# Altium PCB PCB1.PcbDoc
Units mil, origin at the board's own origin, x right, y up, seen from the top; angles counter-clockwise.
Board outline 6000 x 4000 mil, 2 copper layers (Top Layer, Bottom Layer); 37 components, 28 nets, 157 pads, 57 vias.
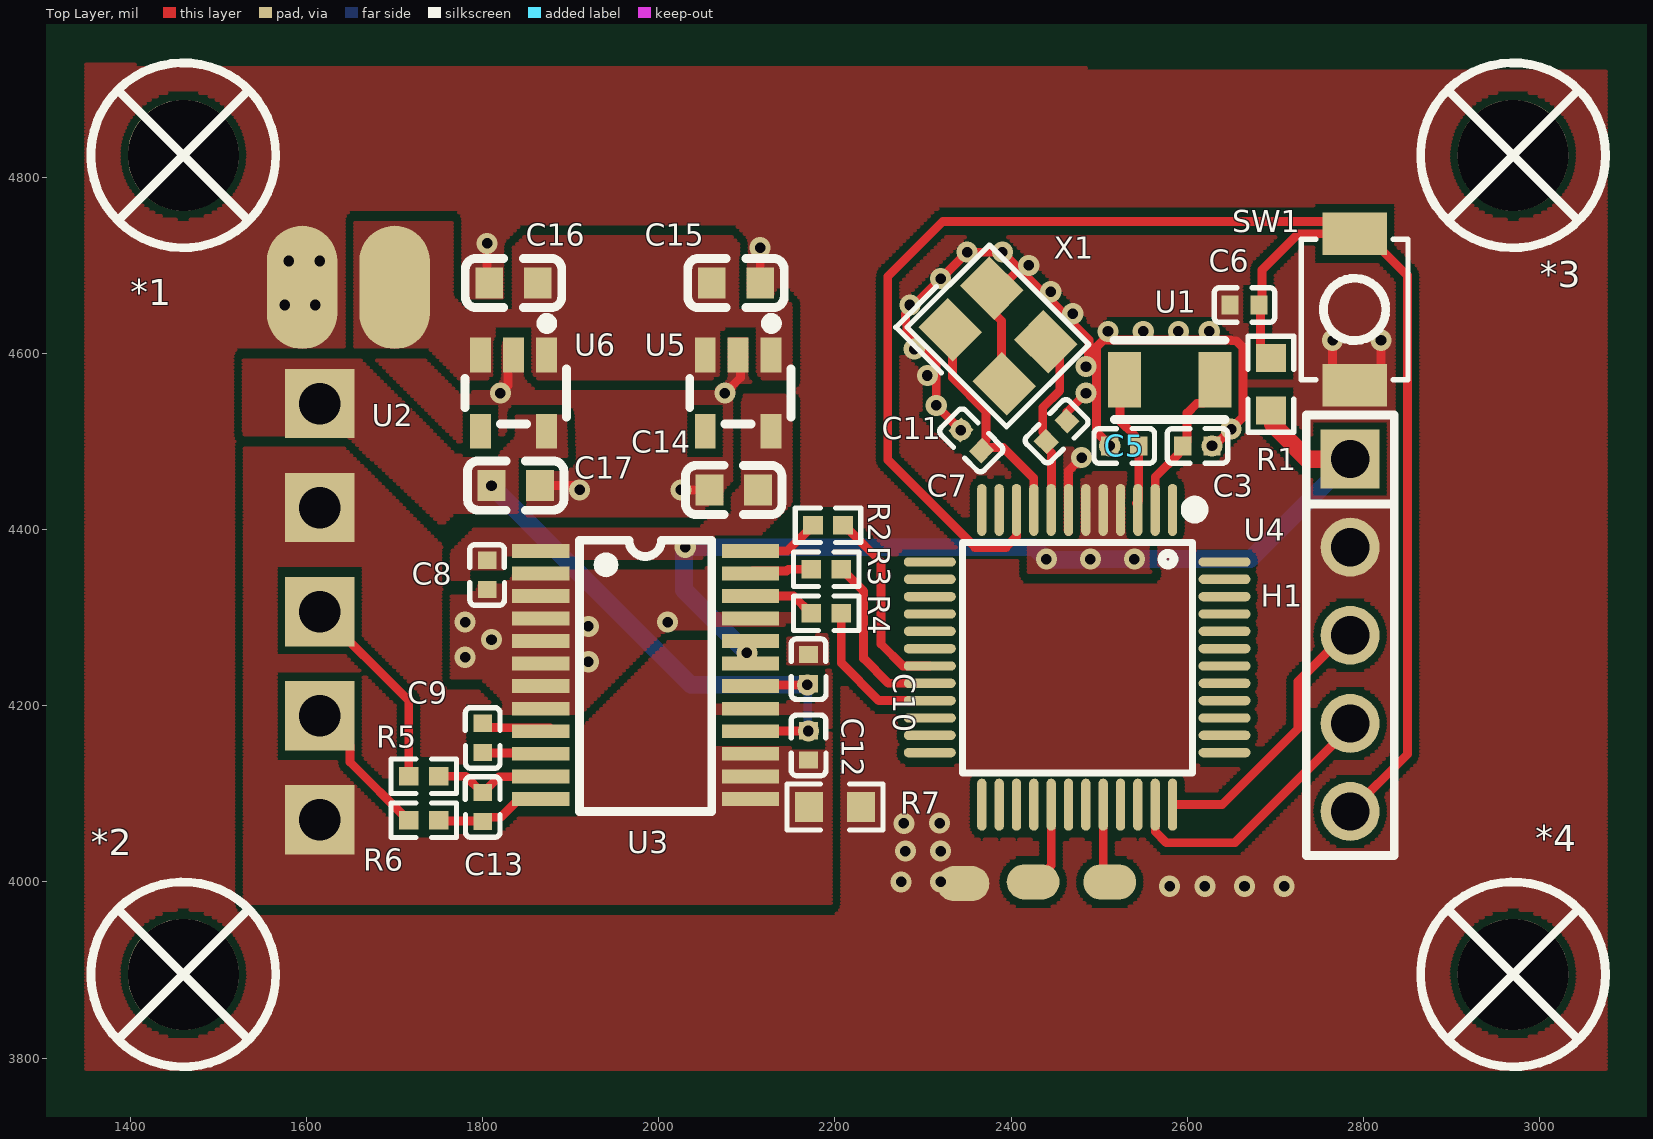
[diagram p0: Top Layer view]
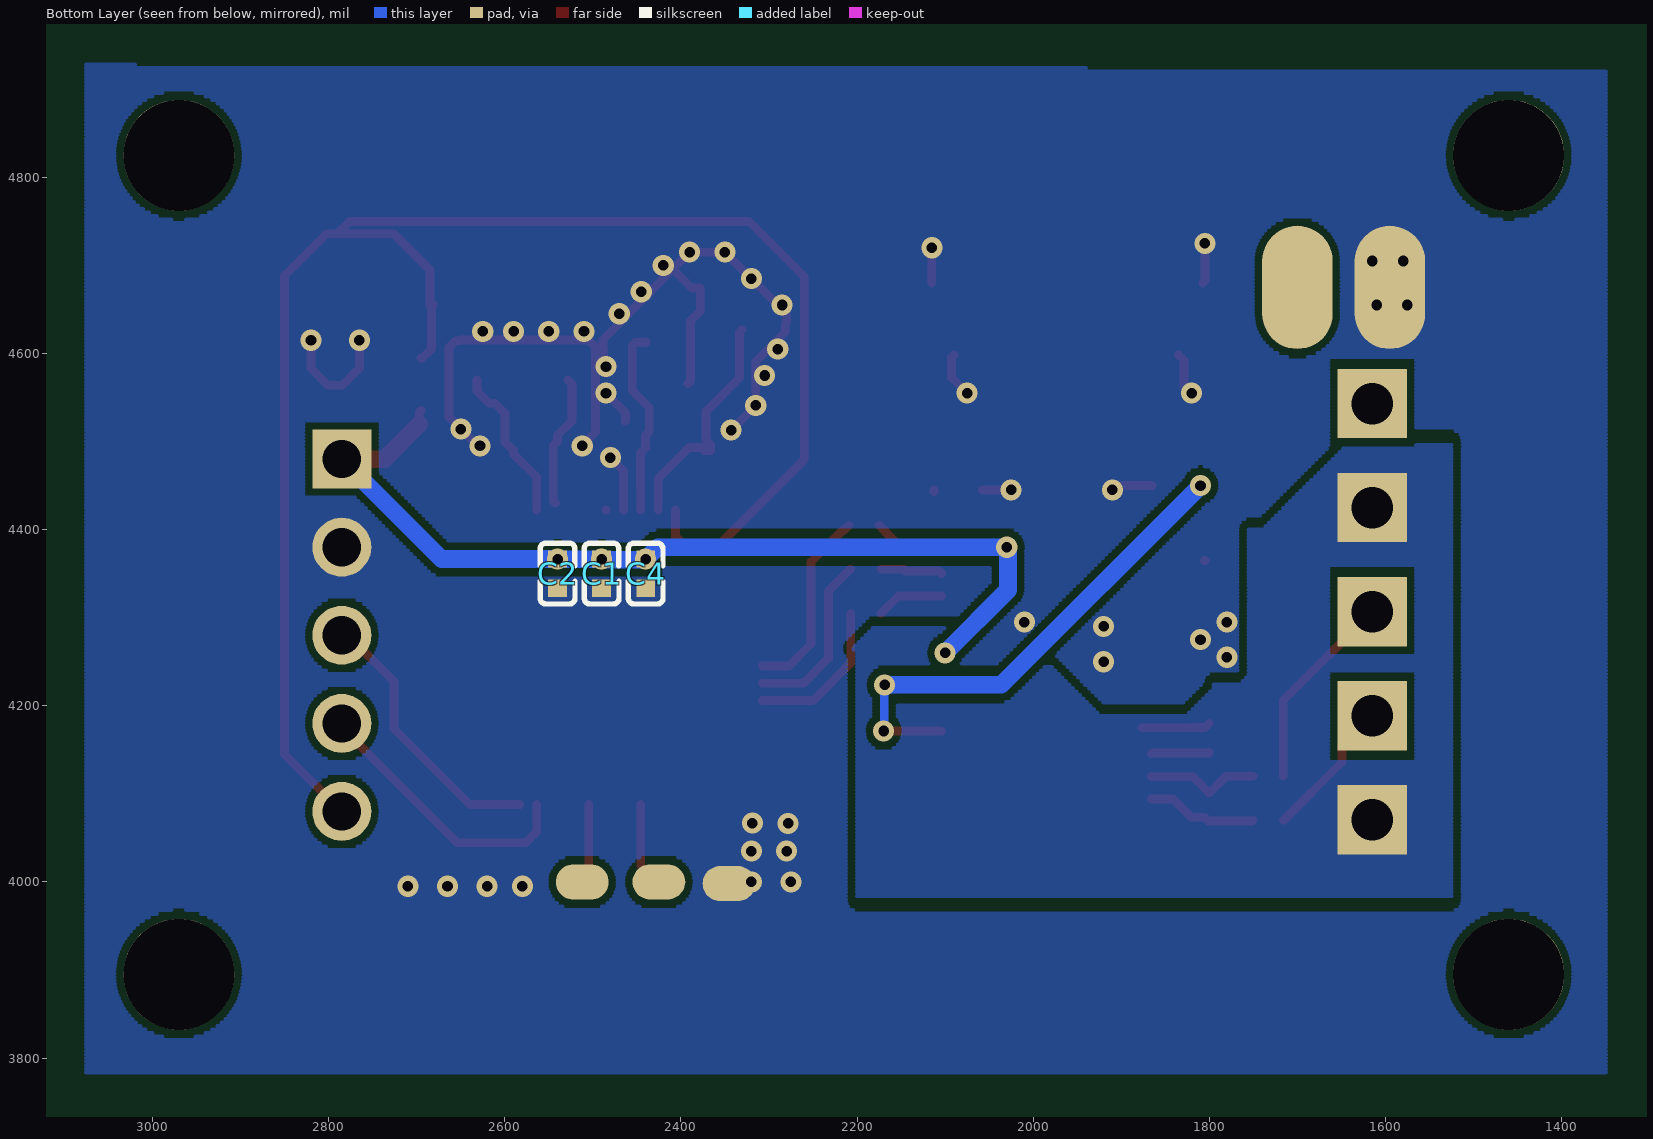
[diagram p1: Bottom Layer view, seen from below]

## Layer stack, top to bottom
Top Solder: solder mask 0.4, Solder Resist, Dk 3.5
Top Layer: signal copper 1.4
Dielectric 1: dielectric 12.6, FR-4, Dk 4.8
Bottom Layer: signal copper 1.4
Bottom Solder: solder mask 0.4, Solder Resist, Dk 3.5

## Board outline
1000,1000 7000,1000 7000,5000 1000,5000

## Design rules (kind name [scope] priority, off if disabled: settings)
Clearance [All] p1: gap=8 ignorepadtopadclearanceinfootprint=FALSE
ComponentClearance [All] p1: gap=0 collisioncheckmode=3 verticalgap=0 showdistances=FALSE
HoleSize [All] p1: absolutevalues=TRUE maxlimit=130 minlimit=1 maxpercent=80.000 minpercent=20.000
MinimumSolderMaskSliver [All] p1: minsoldermaskwidth=4
PlaneConnect [All] p1: planeconnectstyle=Direct reliefexpansion=20 reliefentries=4 reliefconductorwidth=10 reliefairgap=10
PolygonConnect [All] p1: connectstyle=Direct reliefconductorwidth=10 reliefentries=4 polygonreliefangle="90 Angle" airgapwidth=10
RoutingVias [All] p1: holewidth=28 width=50 viastyle="Through Hole" minholewidth=28 minwidth=50 maxholewidth=28 maxwidth=50
SilkToSilkClearance [All] p1: silktosilkclearance=2
SilkToSolderMaskClearance [IsPad] p1: minsilkscreentomaskgap=2 clearancetoexposedcopper=TRUE
SolderMaskExpansion [All] p1: expansion=0 istentingtop=FALSE
SupplyNets "Schematic Supply Nets_2" [InNet('6V')] p1: voltage=0.000
SupplyNets "Schematic Supply Nets" [InNet('3V3')] p2: voltage=0.000
SupplyNets "Schematic Supply Nets_4" [InNet('5V')] p3: voltage=0.000
SupplyNets "Schematic Supply Nets_3" [InNet('DGND')] p4: voltage=0.000
SupplyNets "Schematic Supply Nets_1" [InNet('AGND')] p5: voltage=0.000
Width [All] p1: maxlimit=50 minlimit=10 preferedwidth=10
24 further rules are at their usual default settings.

## Components (designator, comment, footprint, x,y, rotation, side; value= is the part's Value field where it differs from the comment)
*1 "螺丝孔_1" M3螺丝 1460,4825 r0 top
*2 "螺丝孔_1" M3螺丝 1460,3895 r0 top
*3 "螺丝孔_1" M3螺丝 2970,4825 r0 top
*4 "螺丝孔_1" M3螺丝 2970,3895 r0 top
C1 "cc0402krx7r7bb104" C0402 2490,4350 r90 bottom value=100nF
C2 "cc0402krx7r7bb104" C0402 2540,4350 r270 bottom value=100nF
C3 "cc0402jrnpo9bn220" C0402 2611.54,4495 r180 top value=22pF
C4 "cc0402krx7r7bb104" C0402 2440,4350 r270 bottom value=100nF
C5 "cc0402jrnpo9bn220" C0402 2528.46,4495 r0 top value=22pF
C6 "cc0402krx7r7bb104" C0402 2665,4655 r0 top value=100nF
C7 "cc0402jrnpo9bn180" C0402 2451.7,4511.7 r45 top value=18pF
C8 "cc0402krx7r7bb104" C0402 1805,4348.46 r270 top value=100nF
C9 "cc0402krx7r7bb104" C0402 1800,4163.46 r90 top value=100nF
C10 "cc0402krx7r7bb104" C0402 2170,4241.54 r90 top value=100nF
C11 "cc0402jrnpo9bn180" C0402 2354.68,4501.29 r315 top value=18pF
C12 "gcm155r71h103ka55d" C0402 2170,4155 r270 top value=10nF
C13 "gcm155r71h103ka55d" C0402 1800,4085 r270 top value=10nF
C14 "cga0603x5r105k500jt" C0603 2085,4445 r180 top value=1uF
C15 "cga0603x5r105k500jt" C0603 2087.56,4680 r0 top value=1uF
C16 "cga0603x5r105k500jt" C0603 1835,4680 r180 top value=1uF
C17 "cga0603x5r105k500jt" C0603 1837.44,4450 r0 top value=1uF
H1 "pz254v-11-05p" HDR-TH_5P-P2.54-V-M 2785,4280 r270 top
R1 "frc0603f1002ts" R0603 2695,4565 r270 top value=10kΩ
R2 "frc0402f47r0ts" R0402 2192.04,4405 r0 top value=47Ω
R3 "frc0402f47r0ts" R0402 2190,4355 r0 top value=47Ω
R4 "frc0402f47r0ts" R0402 2190,4305 r0 top value=47Ω
R5 "frc0402f1000ts" R0402 1732.96,4120 r0 top value=100Ω
R6 "frc0402f1000ts" R0402 1732.96,4070 r0 top value=100Ω
R7 "0603waf0000t5e" R0603 2200,4085 r0 top value=0Ω
SW1 "ts-1088-ar02016" SW-SMD_L3.9-W3.0-P4.45 2790,4650 r90 top
U1 "fc31m2-32.768-ntlnndtl" CRYSTAL-SMD_L3.2-W1.5 2580,4570 r0 top value=32.768kHz
U2 "5个焊盘" 5个焊盘 1615,4543.1 r270 top
U3 "ads1232ipwr" TSSOP-24_L7.8-W4.4-P0.65-LS6.4-BL 1985,4235 r270 top
U4 "stm32g031c8t6" LQFP-48_L7.0-W7.0-P0.50-LS9.0-BL 2475,4255 r180 top
U5 "tps7a2033pdbvr" SOT-23-5_L2.9-W1.6-P0.95-LS2.8-BR 2090,4555 r90 top
U6 "tps7a2050pdbvr" SOT-23-5_L2.9-W1.6-P0.95-LS2.8-BR 1835,4555 r90 top
X1 "x32258mob4si" CRYSTAL-SMD_4P-L3.2-W2.5-BL 2385,4620 r315 top value=8MHz

## Footprints (in the part's own frame and the unit in brackets; to place one, negate y for a bottom-side part, rotate by r counter-clockwise, add the part's x,y. Pads: shape width x height; smd on the part's side, far side on the other; paste and mask are expansions set on the pad)
5个焊盘 [mm]
  rect 2x2 hole 1.2: 1(0,0) 2(3,0) 3(6.001,0) 4(9,0) 5(12,0)
C0402 [mm]
  rect 0.5x0.54 smd: 1(-0.42,0) 2(0.42,0)
  silkscreen extent -0.87,-0.5 0.87,0.5
C0603 [mm]
  rect 0.8x0.9 smd: 1(-0.7,0) 2(0.7,0)
  silkscreen extent -1.39,-0.71 1.39,0.71
CRYSTAL-SMD_4P-L3.2-W2.5-BL [mm]
  rect 1.4x1.2 smd: 1(-1.1,-0.85) 2(1.1,-0.85) 3(1.1,0.85) 4(-1.1,0.85)
  silkscreen extent -2.26,-1.91 2.03,1.68
CRYSTAL-SMD_L3.2-W1.5 [mm]
  rect 0.95x1.6 smd: 1(-1.308,0) 2(1.308,0)
  silkscreen extent -1.6,-1.14 1.6,1.14
HDR-TH_5P-P2.54-V-M [mm]
  rect 1.7x1.7 hole 1.1: 1(-5.08,0)
  round 1.7 hole 1.1: 2(-2.54,0) 3(0,0) 4(2.54,0) 5(5.08,0)
  silkscreen extent -6.35,-1.27 6.35,1.27
LQFP-48_L7.0-W7.0-P0.50-LS9.0-BL [mm]
  oval 0.27x1.5 smd paste+0 mask+0.05: 1(-2.75,-4.25) 2(-2.25,-4.25) 3(-1.75,-4.25) 4(-1.25,-4.25) 5(-0.75,-4.25) 6(-0.25,-4.25) 7(0.25,-4.25) 8(0.75,-4.25) 9(1.25,-4.25) 10(1.75,-4.25) 11(2.25,-4.25) 12(2.75,-4.25) 25(2.75,4.25) 26(2.25,4.25) 27(1.75,4.25) 28(1.25,4.25) 29(0.75,4.25) 30(0.25,4.25) 31(-0.25,4.25) 32(-0.75,4.25) 33(-1.25,4.25) 34(-1.75,4.25) 35(-2.25,4.25) 36(-2.75,4.25)
  oval 1.5x0.27 smd paste+0 mask+0.05: 13(4.25,-2.75) 14(4.25,-2.25) 15(4.25,-1.75) 16(4.25,-1.25) 17(4.25,-0.75) 18(4.25,-0.25) 19(4.25,0.25) 20(4.25,0.75) 21(4.25,1.25) 22(4.25,1.75) 23(4.25,2.25) 24(4.25,2.75) 37(-4.25,2.75) 38(-4.25,2.25) 39(-4.25,1.75) 40(-4.25,1.25) 41(-4.25,0.75) 42(-4.25,0.25) 43(-4.25,-0.25) 44(-4.25,-0.75) 45(-4.25,-1.25) 46(-4.25,-1.75) 47(-4.25,-2.25) 48(-4.25,-2.75)
  silkscreen extent -3.59,-4.46 3.3,3.34
M3螺丝 [mil]
  round 126 hole 126 paste-99999 mask+4: 1(0,0)
  silkscreen extent -105,-105 105,105
R0402 [mm]
  rect 0.566x0.54 smd paste-100 mask+0.051: 1(-0.433,0) 2(0.433,0)
  silkscreen extent -0.94,-0.5 0.94,0.5
R0603 [mil]
  rect 31.75x34.02 smd paste-3937.01 mask+2: 1(-29.66,0) 2(29.66,0)
  silkscreen extent -55,-26 55,26
SOT-23-5_L2.9-W1.6-P0.95-LS2.8-BR [mm]
  rect 1x0.6 smd paste+0 mask+0.05: 1(1.1,-0.95) 2(1.1,0) 3(1.1,0.95) 4(-1.1,0.95) 5(-1.1,-0.95)
  silkscreen extent -0.89,-1.52 2.16,1.4
SW-SMD_L3.9-W3.0-P4.45 [mm]
  rect 1.23x1.86 smd: 1(-2.185,0) 2(2.185,0)
  silkscreen extent -2.03,-1.54 2.03,1.54
TSSOP-24_L7.8-W4.4-P0.65-LS6.4-BL [mm]
  rect 0.4x1.65 smd: 1(-3.575,-3.023) 2(-2.925,-3.023) 3(-2.275,-3.023) 4(-1.625,-3.023) 5(-0.975,-3.023) 6(-0.325,-3.023) 7(0.325,-3.023) 8(0.975,-3.023) 9(1.625,-3.023) 10(2.275,-3.023) 11(2.925,-3.023) 12(3.575,-3.023) 13(3.575,3.023) 14(2.925,3.023) 15(2.275,3.023) 16(1.625,3.023) 17(0.975,3.023) 18(0.325,3.023) 19(-0.325,3.023) 20(-0.975,3.023) 21(-1.625,3.023) 22(-2.275,3.023) 23(-2.925,3.023) 24(-3.575,3.023)
  silkscreen extent -3.89,-1.91 3.94,1.91

## Part data
C1 C2 C4 C6 C8 C9 C10: "容值:100nF;精度:±10%;额定电压:16V;温度系数:X7R;", JLCPCB Part Class="Extended Part", LCSC Part Name="100nF ±10% 16V", Manufacturer=YAGEO(国巨), ManufacturerPart=CC0402KRX7R7BB104, Temperature Coefficient=X7R, Tolerance=±10%, Voltage Rating=16V, AddInBom=yes, ConvertToPcb=yes, Datasheet=https://item.szlcsc.com/datasheet/CC0402KRX7R7BB104/61526.html, FootprintName=C0402, ModelId=36a51122f27c49738f86b3bfa98863e0, ModelName=C0402_L1.0-W0.5-H0.5, ModelTransform=39.37,19.685,0,0,0,0,0,0,0, Supplier=LCSC, Supplier Footprint=0402, SupplierPart=C60474, Symbol=CC0402KRX7R7BB104
C3 C5: "容值:22pF;精度:±5%;额定电压:50V;温度系数:NP0;", JLCPCB Part Class="Extended Part", LCSC Part Name="22pF ±5% 50V", Manufacturer=YAGEO(国巨), ManufacturerPart=CC0402JRNPO9BN220, Temperature Coefficient=NP0, Tolerance=±5%, Voltage Rating=50V, AddInBom=yes, ConvertToPcb=yes, Datasheet=https://item.szlcsc.com/datasheet/CC0402JRNPO9BN220/107418.html, FootprintName=C0402, ModelId=36a51122f27c49738f86b3bfa98863e0, ModelName=C0402_L1.0-W0.5-H0.5, ModelTransform=39.37,19.685,0,0,0,0,0,0,0, Supplier=LCSC, Supplier Footprint=0402, SupplierPart=C106203, Symbol=CC0402JRNPO9BN220
C7 C11: "容值:18pF;精度:±5%;额定电压:50V;温度系数:NP0;", JLCPCB Part Class="Extended Part", LCSC Part Name="18pF ±5% 50V", Manufacturer=YAGEO(国巨), ManufacturerPart=CC0402JRNPO9BN180, Temperature Coefficient=NP0, Tolerance=±5%, Voltage Rating=50V, AddInBom=yes, ConvertToPcb=yes, Datasheet=https://item.szlcsc.com/datasheet/CC0402JRNPO9BN180/107417.html, FootprintName=C0402, ModelId=36a51122f27c49738f86b3bfa98863e0, ModelName=C0402_L1.0-W0.5-H0.5, ModelTransform=39.37,19.685,0,0,0,0,0,0,0, Supplier=LCSC, Supplier Footprint=0402, SupplierPart=C106202, Symbol=CC0402JRNPO9BN180
C12 C13: "容值:10nF;精度:±10%;额定电压:50V;温度系数:X7R;", JLCPCB Part Class="Extended Part", LCSC Part Name="10nF ±10% 50V", Manufacturer=muRata(村田), ManufacturerPart=GCM155R71H103KA55D, Temperature Coefficient=X7R, Tolerance=±10%, Voltage Rating=50V, AddInBom=yes, ConvertToPcb=yes, Datasheet=https://item.szlcsc.com/datasheet/GCM155R71H103KA55D/92790.html, FootprintName=C0402, ModelId=36a51122f27c49738f86b3bfa98863e0, ModelName=C0402_L1.0-W0.5-H0.5, ModelTransform=39.37,19.685,0,0,0,0,0,0,0, Supplier=LCSC, Supplier Footprint=0402, SupplierPart=C91601, Symbol=GCM155R71H103KA55D
C14 C15 C16 C17: "容值:1uF;精度:±10%;额定电压:50V;温度系数:X5R;", JLCPCB Part Class="Extended Part", LCSC Part Name="1uF ±10% 50V 停产", Manufacturer=HRE(芯声), ManufacturerPart=CGA0603X5R105K500JT, Temperature Coefficient=X5R, Tolerance=±10%, Voltage Rating=50V, AddInBom=yes, ConvertToPcb=yes, Datasheet=https://item.szlcsc.com/datasheet/CGA0603X5R105K500JT/7062558.html, FootprintName=C0603, ModelId=ac125912035d415993ca9572d50418b1, ModelName=C0603_L1.6-W0.8-H0.8, ModelTransform=62.992,31.496,0,0,0,0,0,0,0, Supplier=LCSC, Supplier Footprint=0603, SupplierPart=C6119852, Symbol=CGA0603X5R105K500JT
H1: "插针结构:1x5P;间距:2.54mm;行距:-;圆针/方针:方针;安装方式:直插;排数:单排;总PIN位数:5P;额定电流:3A;额定电压:250V;配合针长度:6mm;塑高:2.5mm;端接针长度:3mm;触头材质:黄铜;触头镀层:-;工作温度:-40℃~+105℃;颜色:黑色;", Color=黑色, Current Rating=3A, JLCPCB Part Class="Extended Part", LCSC Part Name="1x5P 间距:2.54mm 方针 直插", Manufacturer=XFCN(兴飞), ManufacturerPart=PZ254V-11-05P, Operating Temperature=-40℃~+105℃, Voltage Rating (Max)=250V, AddInBom=yes, Circluar Pins/Square Pins=方针, Contact Material=黄铜, Contact Plating=-, ConvertToPcb=yes, Datasheet=https://item.szlcsc.com/datasheet/PZ254V-11-05P/502960.html, FootprintName=HDR-TH_5P-P2.54-V-M, Insulation Height=2.5mm, Length of End Connection Pin=3mm, Length of Mating Pin=6mm, ModelId=47d466e4a34f4fc5bc626cf773a24dd5, ModelName=HDR-TH_5P-P2.54-M-LI-1X5P, ModelTransform=499.999,100,0,0,0,0,0,0,-118.11, Mounting Type=直插, Number of Pins=5P, Number of Rows=单排, Pin Structure=1x5P, Pitch=2.54mm, Row Spacing=-, Supplier=LCSC, Supplier Footprint=插件,P=2.54mm, SupplierPart=C492404, Symbol=PZ254V-11-05P
R1: "电阻类型:厚膜电阻;阻值:10kΩ;精度:±1%;功率:100mW;工作电压:75V;温度系数:±100ppm/℃;", JLCPCB Part Class="Extended Part", LCSC Part Name="10kΩ ±1% 100mW 厚膜电阻", Manufacturer=FOJAN(富捷), ManufacturerPart=FRC0603F1002TS, Operating Temperature=-55℃~+155℃, Power(Watts)=100mW, Temperature Coefficient=±100ppm/℃, Tolerance=±1%, Voltage-Supply(Max)=75V, AddInBom=yes, ConvertToPcb=yes, Datasheet=https://item.szlcsc.com/datasheet/FRC0603F1002TS/3180495.html, FootprintName=R0603, ModelId=fc143cca1e79419f9cd78b61e9279f08, ModelName=R0603, ModelTransform=31.8897,63.7794,0,90,0,0,0,0,0, Supplier=LCSC, Supplier Footprint=0603, SupplierPart=C2906982, Symbol=FRC0603F1002TS, Type=厚膜电阻
R2 R3 R4: "电阻类型:厚膜电阻;阻值:47Ω;精度:±1%;功率:62.5mW;工作电压:50V;温度系数:±100ppm/℃;", JLCPCB Part Class="Extended Part", LCSC Part Name="47Ω ±1% 62.5mW 厚膜电阻", Manufacturer=FOJAN(富捷), ManufacturerPart=FRC0402F47R0TS, Operating Temperature=-55℃~+155℃, Power(Watts)=62.5mW, Temperature Coefficient=±100ppm/℃, Tolerance=±1%, Voltage-Supply(Max)=50V, AddInBom=yes, ConvertToPcb=yes, Datasheet=https://item.szlcsc.com/datasheet/FRC0402F47R0TS/3186297.html, FootprintName=R0402, ModelId=98c88bc2b9094f218f3a3e30a7012738, ModelName=R0402_L1.0-W0.5-H0.4, ModelTransform=39.37,19.685,0,0,0,0,0,0,0, Supplier=LCSC, Supplier Footprint=0402, SupplierPart=C2909362, Symbol=FRC0402F47R0TS, Type=厚膜电阻
R5 R6: "电阻类型:厚膜电阻;阻值:100Ω;精度:±1%;功率:62.5mW;工作电压:50V;温度系数:±100ppm/℃;", JLCPCB Part Class="Extended Part", LCSC Part Name="100Ω ±1% 62.5mW 厚膜电阻", Manufacturer=FOJAN(富捷), ManufacturerPart=FRC0402F1000TS, Operating Temperature=-55℃~+155℃, Power(Watts)=62.5mW, Temperature Coefficient=±100ppm/℃, Tolerance=±1%, Voltage-Supply(Max)=50V, AddInBom=yes, ConvertToPcb=yes, Datasheet=https://item.szlcsc.com/datasheet/FRC0402F1000TS/3180373.html, FootprintName=R0402, ModelId=98c88bc2b9094f218f3a3e30a7012738, ModelName=R0402_L1.0-W0.5-H0.4, ModelTransform=39.37,19.685,0,0,0,0,0,0,0, Supplier=LCSC, Supplier Footprint=0402, SupplierPart=C2906860, Symbol=FRC0402F1000TS, Type=厚膜电阻
R7: "电阻类型:厚膜电阻;阻值:0Ω;精度:±1%;功率:100mW;工作电压:75V;温度系数:-;", JLCPCB Part Class="Basic Part", LCSC Part Name="0Ω ±1% 100mW 厚膜电阻", Manufacturer=UNI-ROYAL(厚声), ManufacturerPart=0603WAF0000T5E, Operating Temperature=-55℃~+155℃, Power(Watts)=100mW, Temperature Coefficient=-, Tolerance=±1%, Voltage-Supply(Max)=75V, AddInBom=yes, ConvertToPcb=yes, Datasheet=https://item.szlcsc.com/datasheet/0603WAF0000T5E/21903.html, FootprintName=R0603, ModelId=fc143cca1e79419f9cd78b61e9279f08, ModelName=R0603, ModelTransform=31.8897,63.7794,0,90,0,0,0,0,0, Supplier=LCSC, Supplier Footprint=0603, SupplierPart=C21189, Symbol=0603WAF0000T5E, Type=厚膜电阻
SW1: "电路结构:单刀单掷;按钮形状:圆形按钮;作用力:1.6N;安装方式:立贴;开关长度:3.9mm;开关宽度:3mm;开关高度:2mm;带支架:不带支架;触点电流:50mA;额定电压:12V;带灯:-;工作寿命:10万次;", Actuator/Cap Color=黑色, Contact Current=50mA, IP Rating=-, JLCPCB Part Class="Basic Part", LCSC Part Name="3.9*3*2mm 立贴 轻触开关", Manufacturer=XUNPU(讯普), ManufacturerPart=TS-1088-AR02016, Operating Force=1.6N, Operating Temperature=-30℃~+80℃, Voltage Rating=12V, Actuator Style=圆形按钮, AddInBom=yes, Circuit=单刀单掷, ConvertToPcb=yes, Datasheet=https://item.szlcsc.com/datasheet/TS-1088-AR02016/763484.html, FootprintName=SW-SMD_L3.9-W3.0-P4.45, Length=3.9mm, Life=10万次, ModelId=b26698b69f274ffabef8a26c7d0e5dd1, ModelName=SW-SMD_L3.9-W2.9-H2.0-LS4.8, ModelTransform=188.976,114.174,0,0,0,0,0,0,0, Mounting Type=立贴, Supplier=LCSC, Supplier Footprint=SMD,4x3mm, SupplierPart=C720477, Switch Height=2mm, Symbol=TS-1088-AR02016, Termination Style=SMD接片, Width=3mm, with Bracket=不带支架, With Lamp=-
U1: "晶振类型:贴片晶振;频率:32.768kHz;常温频差:±10ppm;负载电容:12.5pF;频率稳定度:±10ppm;", Equivalent Series Resistance(ESR)=70kΩ, Frequency Stability=±10ppm, JLCPCB Part Class="Extended Part", LCSC Part Name="3215 2P 32.768kHz 12.5pF ±10ppm -40~+85℃(±10ppm)", Load Capacitance=12.5pF, Manufacturer=HCI(杭晶), ManufacturerPart=FC31M2-32.768-NTLNNDTL, Operating Temperature=-40℃~+85℃, AddInBom=yes, ConvertToPcb=yes, Datasheet=https://item.szlcsc.com/datasheet/FC31M2-32.768-NTLNNDTL/5705379.html, FootprintName=CRYSTAL-SMD_L3.2-W1.5, ModelId=762d7afc596f4558a373612390f4386d, ModelName=CRYSTAL-SMD_L3.2-W1.5-1, ModelTransform=125.984,59.055,0,0,0,0,0,0,0, Normal temperature Frequency Tolerance=±10ppm, Supplier=LCSC, Supplier Footprint=SMD3215-2P, SupplierPart=C5120559, Symbol=FC31M2-32.768-NTLNNDTL, Type=贴片晶振
U3: "分辨率(位):24;采样率:10Hz;工作电压:2.7V~5.3V;接口类型:SPI;", Clock Frequency=4.9152MHz；200kHz~8MHz, JLCPCB Part Class="Extended Part", LCSC Part Name="用于桥式传感器的24bit 模数转换器", Manufacturer=TI(德州仪器), ManufacturerPart=ADS1232IPWR, Operating Temperature=-40℃~+105℃, Quiescent Current (Iq)=1.3uA, Temperature Sensors=内置, Voltage - Supply=2.7V~5.3V, Voltage Reference=外置, Voltage Reference Drift=-, ADC architecture=Sigma-Delta, AddInBom=yes, Clock/Oscillator=内置；外置, ConvertToPcb=yes, Data rate=80Hz；10Hz, Datasheet=https://www.ti.com/cn/lit/gpn/ads1232, differential input=是, FootprintName=TSSOP-24_L7.8-W4.4-P0.65-LS6.4-BL, Full-Scale Range(FSR)=39mV；1.25V；19.5mV；2.5V, Integral non - linearity=-, Interface=SPI, ModelId=57e278220af748a2882c4abba4094eb9, ModelName=TSSOP-24_L7.8-W4.4-H1.0-LS6.4-P0.65, ModelTransform=252.188,307.086,0,90,0,0,0,0,0, number of channels=2, Programmable Gain=支持, Resolution (Bits)=24, Sampling Rate=10Hz, Signal-to-Noise Ratio=-, Supplier=LCSC, Supplier Footprint=TSSOP-24, SupplierPart=C27919, Symbol=ADS1232IPW
U4: "CPU内核:ARM Cortex-M0+;CPU最大主频:64MHz;CPU位数:32 Bit;", JLCPCB Part Class="Extended Part", LCSC Part Name="主流Arm Cortex-M0+ MCU，具有64 KB Flash存储器、8 KB RAM、64 MHz CPU、2x USART、定时器、ADC和通信接口，1.7-3.6V", Manufacturer=ST(意法半导体), ManufacturerPart=STM32G031C8T6, Operating Temperature=-40℃~+85℃, Voltage - Supply=1.7V~3.6V, ADC (Bit)=12bit, AddInBom=yes, ConvertToPcb=yes, Core Size="32 Bit", CPU Core="ARM Cortex-M0+", CPU Maximum Speed=64MHz, Datasheet=https://item.szlcsc.com/datasheet/STM32G031C8T6/428993.html, EEPROM=-, FootprintName=LQFP-48_L7.0-W7.0-P0.50-LS9.0-BL, ModelId=093be70396ff421eb2cdb946d5311efc, ModelName=LQFP-48_L7.0-W7.0-H1.4-LS9.0-P0.50, ModelTransform=354.331,354.331,0,0,0,0,0,0,0, Number of I/O=44, Oscillator Type=内置+外置, Program Memory Type=FLASH, Program Storage Size=64KB, RAM Size=8KB, Supplier=LCSC, Supplier Footprint=LQFP-48(7x7), SupplierPart=C432205, Symbol=STM32G031C8T6
U5: "输出类型:固定;最大输入电压:6V;输出电压:3.3V;输出电流:300mA;输出极性:正极;", Dropout Voltage=140mV@(300mA), JLCPCB Part Class="Extended Part", LCSC Part Name="具有高 PSRR 的 300mA、超低噪声、低 IQ、低压降 (LDO) 线性稳压器", Manufacturer=TI(德州仪器), ManufacturerPart=TPS7A2033PDBVR, Maximum Input Voltage=6V, Operating Temperature=-40℃~+125℃@(Tj), Output Current=300mA, Output Voltage=3.3V, standby current=15uA, AddInBom=yes, ConvertToPcb=yes, Datasheet=https://www.ti.com/cn/lit/gpn/tps7a20, Feature=防静电保护；软启动；浪涌保护；低ESR；热保护(TSD)；欠压闭锁；过流保护(OCP)；带使能；防倒灌, FootprintName=SOT-23-5_L2.9-W1.6-P0.95-LS2.8-BR, ModelId=7ba65df16e7b4570af156e925f9c37fe, ModelName=SOT-23-5_L2.9-W1.6-P0.95-LS2.8-BR, ModelTransform=114.173,114.173,0,90,0,0,0,0,0, Number of Outputs=1, Output Polarity=正极, Output Type=固定, Supplier=LCSC, Supplier Footprint=SOT-23-5, SupplierPart=C2862740, Symbol=TPS7A2033PDBVR
U6: "输出极性:正极;工作电压:6V;输出电压:5V;输出电流:300mA;电源纹波抑制比(PSRR):65dB@(100Hz);输出类型:固定;", JLCPCB Part Class="Extended Part", LCSC Part Name="800mV~5.5V 300mA 6V", Manufacturer=TI(德州仪器), ManufacturerPart=TPS7A2050PDBVR, Operating Temperature=-40℃~+125℃@(Tj), Output Current=300mA, Output Voltage=5V, Power Supply Rejection Ratio (PSRR)=65dB@(100Hz), standby current=6.5uA, Voltage - Supply=6V, Voltage Dropout=140mV@(300mA), AddInBom=yes, ConvertToPcb=yes, Datasheet=https://www.ti.com/cn/lit/ds/symlink/tps7a20.pdf, Features=使能控制；输入欠压保护；内置软启动；短路保护；过流保护；输出放电；热关断, FootprintName=SOT-23-5_L2.9-W1.6-P0.95-LS2.8-BR, ModelId=7ba65df16e7b4570af156e925f9c37fe, ModelName=SOT-23-5_L2.9-W1.6-P0.95-LS2.8-BR, ModelTransform=114.173,114.173,0,90,0,0,0,0,0, Noise=10uVrms, Number of Outputs=1, Output Configuration=正极, Output Type=固定, Supplier=LCSC, Supplier Footprint=SOT-23-5, SupplierPart=C2864504, Symbol=TPS7A2050PDBVR
X1: "晶振类型:贴片晶振;频率:8MHz;常温频差:±10ppm;负载电容:12pF;频率稳定度:±20ppm;", Equivalent Series Resistance(ESR)=180Ω, Frequency Stability=±20ppm, JLCPCB Part Class="Extended Part", LCSC Part Name="YSX321SL 8MHZ 4P 3225 12PF ±10PPM -40~85℃ (±20PPM)", Load Capacitance=12pF, Manufacturer=YXC(扬兴晶振), ManufacturerPart=X32258MOB4SI, Normal temperature Frequency Tolerance=±10ppm, Operating Temperature=-40℃~+85℃, AddInBom=yes, ConvertToPcb=yes, Datasheet=https://item.szlcsc.com/datasheet/X32258MOB4SI/2777872.html, FootprintName=CRYSTAL-SMD_4P-L3.2-W2.5-BL, ModelId=ff2dfd5650294453a14147960efe1838, ModelName=CRYSTAL-SMD_4P-L3.2-W2.5-BL, ModelTransform=125.984,98.425,0,0,0,0,0,0,0, Supplier=LCSC, Supplier Footprint=SMD3225-4P, SupplierPart=C2682775, Symbol=X32258MOB4SI, Type=贴片晶振
U2: Add into BOM=yes, Convert to PCB=yes, Device=5个焊盘, Symbol=5个焊盘

## Free pads (board coordinates)
  oval 80x140 all layers, no hole: 7(1595,4675) 7(1700,4675)
  oval 60x40 all layers, no hole: 7(2345.3,3998) 7(2425,4000) 7(2512,3999.83)

## Via types
v1: diameter 24, hole 12, Top Layer to Bottom Layer, tented both sides, 57 vias

## Nets (pads, with @x,y where several pads share a name; then routed paths per layer and width w, separated by ;. In a path a pad name is that pad's centre, name@x,y a point inside that pad or via, vN(x,y) a via of type N, cw(c..) or ccw(c..) an arc to the next point about the centre after c; other vN are vias at no path point)
3V3: C1.2 C2.1 C4.1 C8.1 C14.1 H1.1 R1.2 U3.1 U3.19 U3.20 U4.4 U4.5 U4.6 U5.5 | length 1084.5
  Top Layer w10: C8.1 C8.1@1805.79,4365 ; C14.1@2112.56,4443.03 C14.1 ; v1(2440,4366.54) v1@2442.68,4369.22 ; U4.6@2484.72,4422.2 U4.6 ; R1.2 2697.01,4533.33 R1.2@2697.01,4519.53
  Top Layer w20: R1.2@2697.01,4519.53 2736.54,4480 H1.1
  Bottom Layer w10: v1@2028.6,4378.6 v1(2030,4380) ; 2058.74,4380 2060.53,4378.21
  Bottom Layer w20: v1@2028.6,4378.6 2028.6,4331.4 v1(2100,4260) ; v1@2030.11,4379.89 2426.18,4379.89 C4.1@2439.37,4366.7 ; C4.1@2440.69,4365.85 C1.2@2489.31,4365.85 ; C1.2@2490.63,4366.49 C2.1@2539.37,4366.49 ; v1(2540,4366.54) 2671.54,4366.54 H1.1
  other v1: 2490,4366.54
5V: C10.1 C12.1 C17.1 U2.1 U3.16 U3.18 U6.5 | length 638.5
  Top Layer w10: U3.16 2104.26,4171.28 v1(2169.74,4171.28) C12.1 ; U3.18 2105.39,4223.6 v1(2168.61,4223.6) C10.1
  Bottom Layer w10: v1(2168.61,4223.6) 2169.17,4223.04 2169.17,4171.85 v1(2169.74,4171.28)
  Bottom Layer w20: v1(1810,4450) 2036.39,4223.6 v1(2168.61,4223.6)
6V: C15.1 C16.1 pad.7@1700,4675 U5.1 U5.3 U6.1 U6.3
AGND: C10.2 C12.2 R7.1 U2.2 U2.5 U3.13 U3.14 U3.15 U3.17
AINN1: R6.1 U2.4 | length 160.9
  Top Layer w10: U2.4 1649.37,4154.39 1649.37,4136.04 1715.41,4070 R6.1
AINP1: R5.1 U2.3 | length 228.7
  Top Layer w10: U2.3 1715.92,4205.94 R5.1
DGND: C1.1 C2.2 C3.1 C4.2 C5.1 C6.1 C7.2 C8.2 C11.1 C14.2 C15.2 C16.2 C17.2 H1.2 pad.7@1595,4675 pad.7@2345.3,3998 R7.2 SW1.1 U3.2 U3.3 U3.4 U3.5 U3.6 U3.7 U3.8 U3.21 U4.7 U5.2 U6.2 X1.2 X1.4 | length 1554.1
  Top Layer w10: v1(1805,4725) 1805,4682.44 C16.2 ; v1(1820,4555) 1828.62,4563.62 1828.62,4591.92 U6.2 ; C17.2 1901.21,4450 1906.21,4445 v1(1910,4445) ; v1(2025,4445) C14.2 ; v1(2075,4555) 2092.68,4572.68 2092.68,4595.63 U5.2 ; v1(2115,4720) 2115.12,4719.88 C15.2 ; v1(2342.98,4512.98) v1(2315,4540.96) 2315,4590.88 2281.52,4624.36 2281.52,4633.48 2280,4635 2280,4645 v1(2350,4715) v1(2390,4715) v1@2409.14,4695.86 ; X1.2 2389.18,4568.5 2389.18,4636.81 2378.04,4647.95 X1.4 2387.57,4674.29 v1@2409.14,4695.86 ; C7.2 2462.83,4523.95 2462.83,4530.8 2463.39,4531.35 2463.39,4533.39 v1(2485,4555) ; U4.7 2465.16,4466.85 v1(2480,4481.69) v1@2480,4485 ; v1(2485,4585) 2487.68,4587.68 2487.68,4604.07 2488.48,4604.87 2488.48,4615.64 2457.06,4647.06 2457.06,4647.94 v1@2409.14,4695.86 ; v1(2511.92,4495) 2511.92,4495.79 2496.8,4510.91 2496.8,4606.88 2505.36,4615.44 2649.41,4615.44 2650.35,4614.5 2655.59,4614.5 2663.2,4606.88 2663.2,4527.61 v1(2649.71,4514.12) 2636.22,4500.63 2632.92,4500.63 C3.1@2628.08,4495.79 ; v1(2765,4615) 2765,4583.19 2784.21,4563.98 SW1.1 2800.79,4563.98 2820,4583.19 v1(2820,4615)
  other v1: 2580,3995 2620,3995 2665,3995 2710,3995 2275,4000 2320,4000 2280,4035 2320,4035 2278.25,4066.36 2318.85,4066.77 1920,4250 1780,4255 1810,4275 1920,4290 1780,4295 2010,4295 2628.08,4495 2305,4575 2290,4605 2510,4625 2550,4625 2590,4625 2625,4625 2470,4645 1575,4655 1610,4655 2285,4655 2445,4670 2320,4685 2420,4700 1580,4705 1615,4705
DOUT: R2.2 U4.19 | length 219.3
  Top Layer w10: R2.2 2214.71,4399.37 2216.12,4399.37 2252.26,4363.23 2252.26,4270.14 2277.13,4245.28 2307.56,4245.28 U4.19
NetC3_2: C3.2 U1.2 U4.2 | length 179.8
  Top Layer w10: U4.2 2563.58,4440 2563.58,4459.72 2590.16,4486.3 2590.16,4490.16 2599.84,4499.84 2599.84,4532.3 2611.05,4543.5 2617.8,4543.5 2631.5,4557.21 U1.2
NetC5_2: C5.2 U1.1 U4.3 | length 152
  Top Layer w10: U1.1 2523.5,4565 2523.5,4523.5 2540.16,4506.85 2540.16,4499.84 C5.2 2545,4432.48 U4.3@2542.53,4430
NetC7_1: C7.1 U4.8 X1.3 | length 216.4
  Top Layer w10: X1.3 2440,4612.33 2452.33,4612.33 2455.11,4609.54 2455.11,4557.75 2435.91,4538.56 2435.91,4510.93 2440,4506.85 2440,4493.15 2445.87,4487.28 2445.87,4447.11 2445.59,4446.82 2445.59,4422.89 U4.8@2445.76,4422.72
NetC9_1: C9.1 U3.10 | length 66.6
  Top Layer w10: C9.1 1800.74,4146.18 1865.26,4146.18 U3.10
NetC9_2: C9.2 U3.9 | length 78.3
  Top Layer w10: C9.2 1804.84,4175.16 1819.84,4175.16 1820,4175 U3.9@1876.23,4175
NetC11_2: C11.2 U4.9 X1.1 | length 267.5
  Top Layer w10: X1.1 2333.5,4624.18 2333.5,4572.39 2371.34,4534.54 2371.34,4501.41 2366.37,4496.44 C11.2 2373.22,4489.59 2376.7,4493.07 2391.02,4493.07 2425.67,4458.42 2425.67,4422.44 U4.9
NetC13_1: C13.1 R5.2 U3.11 | length 131.2
  Top Layer w10: R5.2 1780.75,4120 1799.21,4101.54 C13.1 1800.79,4101.54 1818.52,4119.27 1865.43,4119.27 U3.11
NetC13_2: C13.2 R6.2 U3.12 | length 127.3
  Top Layer w10: R6.2 1750.77,4069.23 1799.23,4069.23 C13.2 1804.84,4073.3 1820.44,4073.3 1841.39,4094.26 U3.12
NetR2_1: R2.1 U3.24 | length 83.4
  Top Layer w10: U3.24 2145.74,4375.74 2168.86,4398.86 2168.86,4399.37 2174.49,4405 R2.1
NetR3_1: R3.1 U3.23 | length 71
  Top Layer w10: U3.23 2106.87,4353.02 2144.85,4353.02 2146.82,4355 R3.1
NetR4_1: R4.1 U3.22 | length 77.1
  Top Layer w10: U3.22 2152.89,4324.56 2172.45,4305 R4.1
NRST: C6.2 H1.5 R1.1 SW1.2 U4.10 | length 1937.5
  Top Layer w10: U4.10 2405.98,4422.2 2405.98,4391.77 2394.01,4379.79 2359.14,4379.79 2259.83,4479.1 2259.83,4687.33 2322.36,4749.85 2776.17,4749.85 SW1.2 ; C6.2 C6.2@2681.54,4655.79 ; R1.1 2693.87,4594.66 2682.99,4605.54 2682.99,4652.99 2685,4655 2685,4695 2726.02,4736.02 SW1.2 ; H1.5 2850,4145 2850,4688.42 2802.4,4736.02 SW1.2
PDWN: R4.2 U4.21 | length 174.8
  Top Layer w10: R4.2 2207.04,4248.59 2249.84,4205.79 U4.21
SCLK: R3.2 U4.20 | length 199
  Top Layer w10: R3.2 2207.55,4355 2232.46,4330.09 2232.46,4253.73 2260.6,4225.59 2307.56,4225.59 U4.20
SWCLK: H1.3 U4.36 | length 312.7
  Top Layer w10: U4.36 2639.37,4087.68 2725.86,4174.17 2725.86,4227.64 2778.22,4280 H1.3
SWDIO: H1.4 U4.35 | length 315.9
  Top Layer w10: U4.35 2563.7,4087.56 2563.7,4057.14 2576.32,4044.52 2654.07,4044.52 2785,4175.45 H1.4
USART1_RX: pad.7@2512,3999.83 U4.32 | length 90.9
  Top Layer w10: U4.32 2504.65,4087.56 2504.65,4007.18 pad.7@2512,3999.83
USART1_TX: pad.7@2425,4000 U4.29 | length 97.3
  Top Layer w10: pad.7@2425,4000 2426.88,4000 2445.47,4018.59 U4.29
USART2_RX: U4.14
USART2_TX: U4.13
pads on no net: *1.1 *2.1 *3.1 *4.1 U4.1 U4.11 U4.12 U4.15 U4.16 U4.17 U4.18 U4.22 U4.23 U4.24 U4.25 U4.26 U4.27 U4.28 U4.30 U4.31 U4.33 U4.34 U4.37 U4.38 U4.39 U4.40 U4.41 U4.42 U4.43 U4.44 U4.45 U4.46 U4.47 U4.48 U5.4 U6.4

## Polygon pours and split planes (outlines as drawn)
DGND on Top Layer "NONET_L-01_P-001" (hatched Horizontal grid 4 track 5, remove dead copper, pour order 15): 1350,4928.2 1350,3785 3075,3785 3075,4921.81
5V on Top Layer "NONET_L-01_P-001" (hatched Horizontal grid 4 track 5, remove dead copper, pour order 9): 1893.57,4530 1873.57,4530 1838.57,4530 1838.57,4505 1818.57,4485 1768.57,4485 1658.57,4595 1528.57,4595 1528.57,4505 1645,4505 1680,4475 1753.57,4405 1768.57,4420 1838.57,4420 1838.57,4480 1843.57,4485 1848.57,4480 1895,4480
3V3 on Top Layer "NONET_L-01_P-001" (hatched Horizontal grid 4 track 5, remove dead copper, pour order 8): 2420,4385 2420,4350 2560,4350 2555,4355 2555,4385 2545,4385 2535,4395 2535,4465 2475,4465 2475,4390 2425,4390
AGND on Top Layer "NONET_L-01_P-001" (hatched Horizontal grid 4 track 5, remove dead copper, pour order 7): 1565,4495 1640,4495 1755,4380 1755,4225 1795,4225 1827.5,4192.5 1907.5,4192.5 1915,4185 2010,4280 2180,4280 2185,4285 2195,4275 2195,3975 2180,3975 2160,3975 1530,3975 1530,4495
DGND on Top Layer "NONET_L-01_P-001" (hatched Horizontal grid 4 track 5, remove dead copper, pour order 5): 1765,4340 1820,4340 1832.5,4352.5 1830,4355 1830,4365 1905,4365 1960,4310 2135,4310 2135,4290 2130,4285 2005,4285 1905,4185 1830,4185 1830,4200 1800,4230 1765,4230
6V on Top Layer "NONET_L-01_P-001" (hatched Horizontal grid 4 track 5, remove dead copper, pour order 3): 1655,4750 1655,4605 1740,4605 1780,4565 1785,4570 1810,4570 1810,4615 1820,4625 1855,4625 1855,4580 1865,4570 2070,4570 2070,4625 2075,4630 2105,4630 2105,4585 2120,4570 2150,4570 2150,4655 2140,4665 2090,4665 2090,4725 2080,4735 1850,4735 1835,4720 1835,4650 1780,4650 1765,4665 1765,4750
3V3 on Top Layer "NONET_L-01_P-001" (hatched Horizontal grid 4 track 5, remove dead copper, pour order 2): 2095,4555 2095,4450 2045,4400 1790,4400 1765,4375 1765,4340 1820,4340 1845,4365 2045,4365 2070,4390 2110,4390 2150,4430 2150,4545 2140,4555
DGND on Bottom Layer "NONET_L-01_P-001" (hatched Horizontal grid 4 track 5, remove dead copper, pour order 16): 3075,4928.2 3075,3780 1350,3780 1350,4921.81
AGND on Bottom Layer "NONET_L-01_P-001" (hatched Horizontal grid 4 track 5, remove dead copper, pour order 12): 1525,4500 1640,4500 1740,4400 1755,4400 1755,4235 1765,4225 1795,4225 1795,4220 1825,4190 1925,4190 2025,4290 2180,4290 2205,4265 2200,4260 2200,3980 1525,3980

## Other copper
Top Layer:
  pour cut-out: 2275,4655 2350,4730 2350,4735 2390,4735 2485,4640 2485,4635 2495,4625 2510,4640 2630.08,4640 2665,4605.08 2665,4510 2630,4475 2490,4475 2445,4520 2415,4490 2335,4490 2295,4530 2300,4535 2300,4580 2265,4615 2270,4620 2270,4660

## Silkscreen, mask and mechanical layers (free items; w line width, h text height)
Mechanical 1:
  lines w10: 1345,3775 3085,3775 3085,4930 1345,4930 1345,3775